# Altium PCB NeoBoard.PcbDoc
Units mil, origin at the board's own origin, x right, y up, seen from the top; angles counter-clockwise.
Board outline 15575.5 x 4696.93 mil, 2 copper layers (Top Layer, Bottom Layer); 181 components, 132 nets, 700 pads, 47 vias.
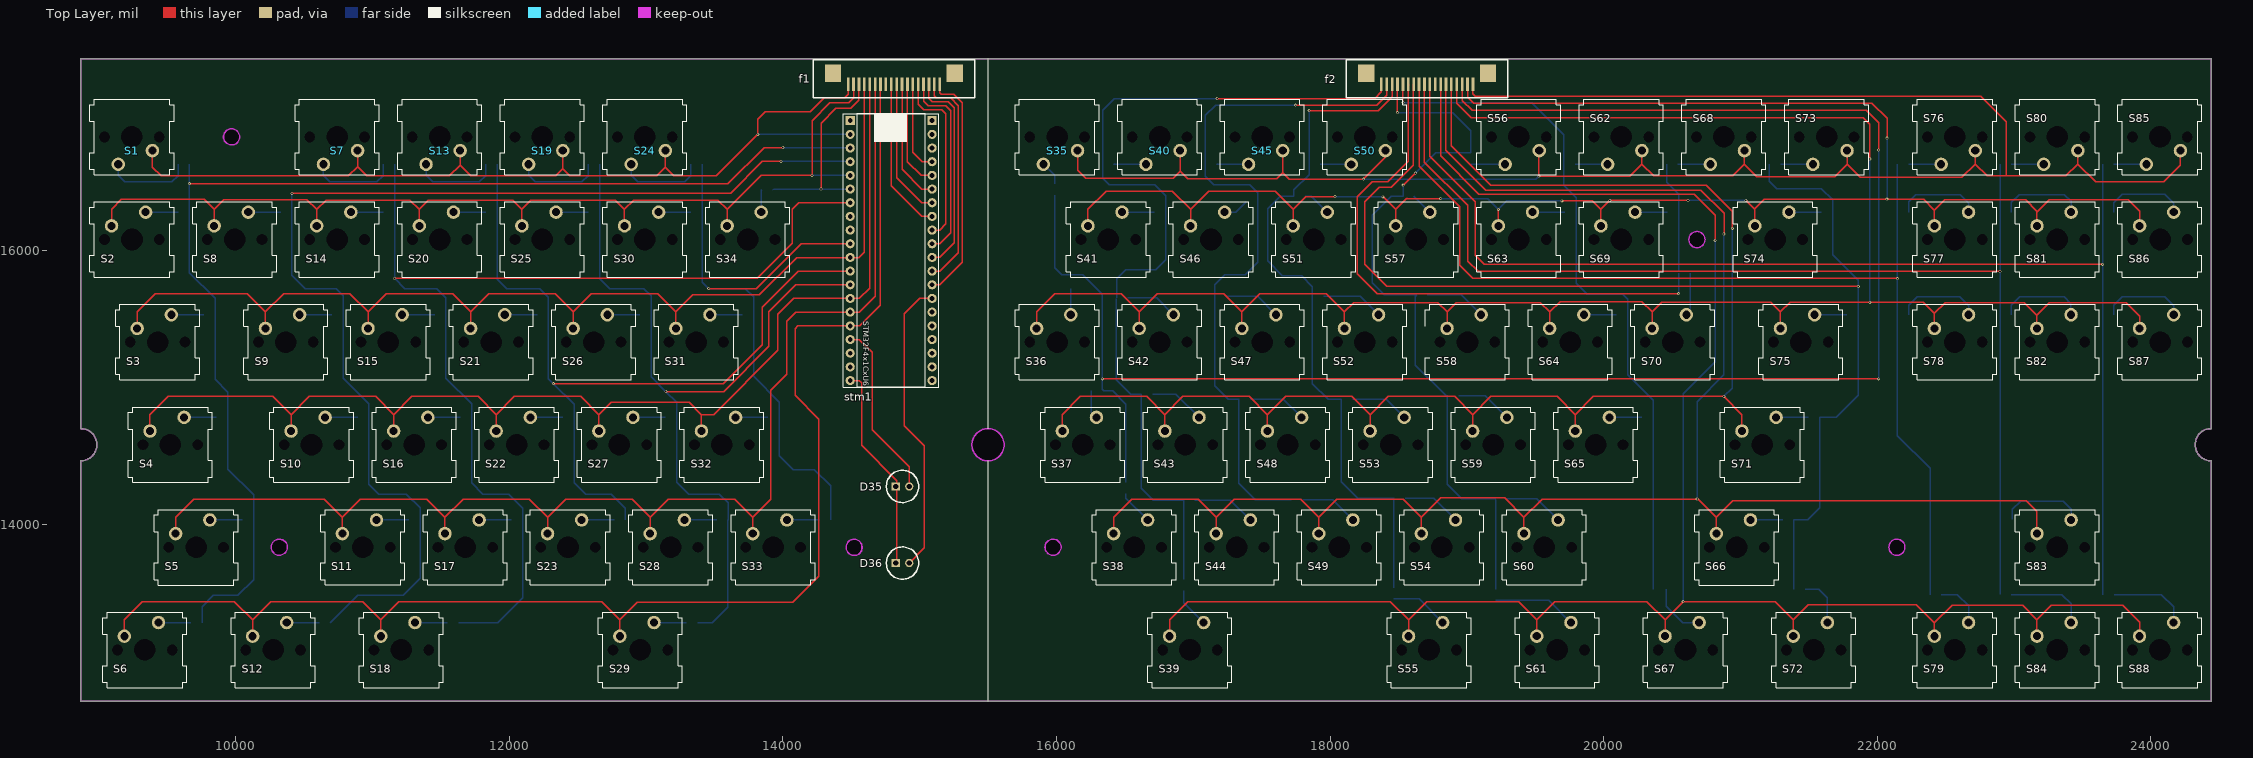
[diagram p0: Top Layer view]
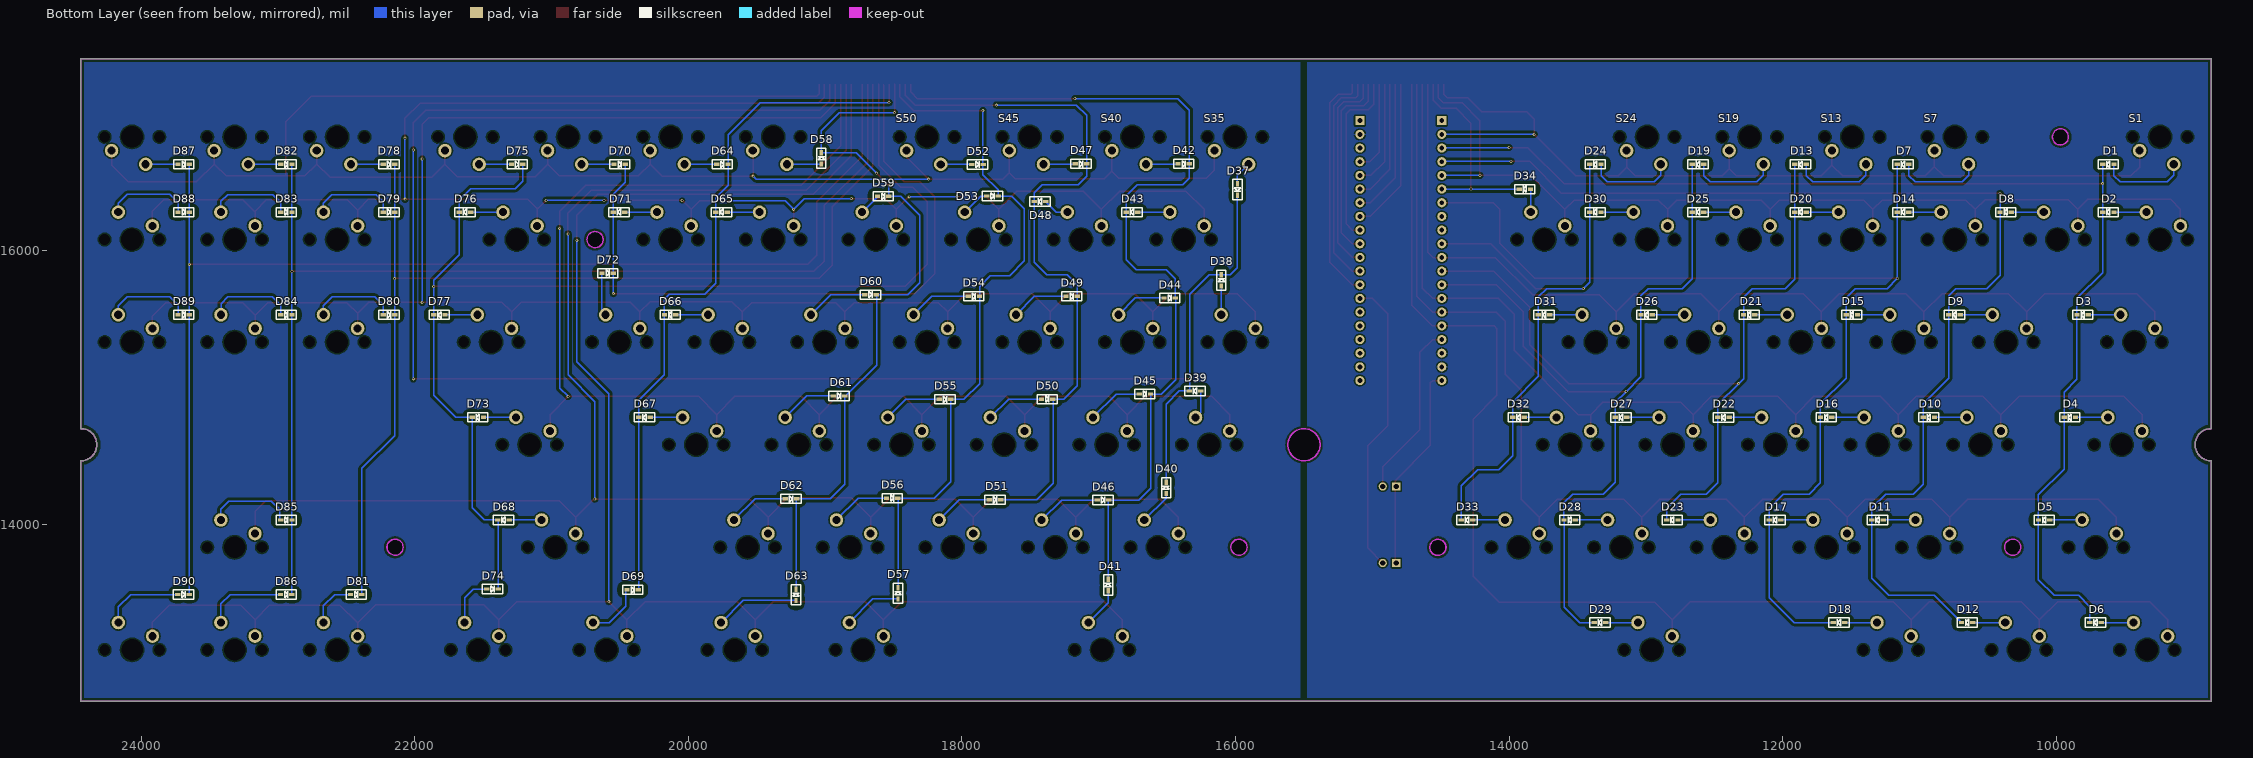
[diagram p1: Bottom Layer view, seen from below]
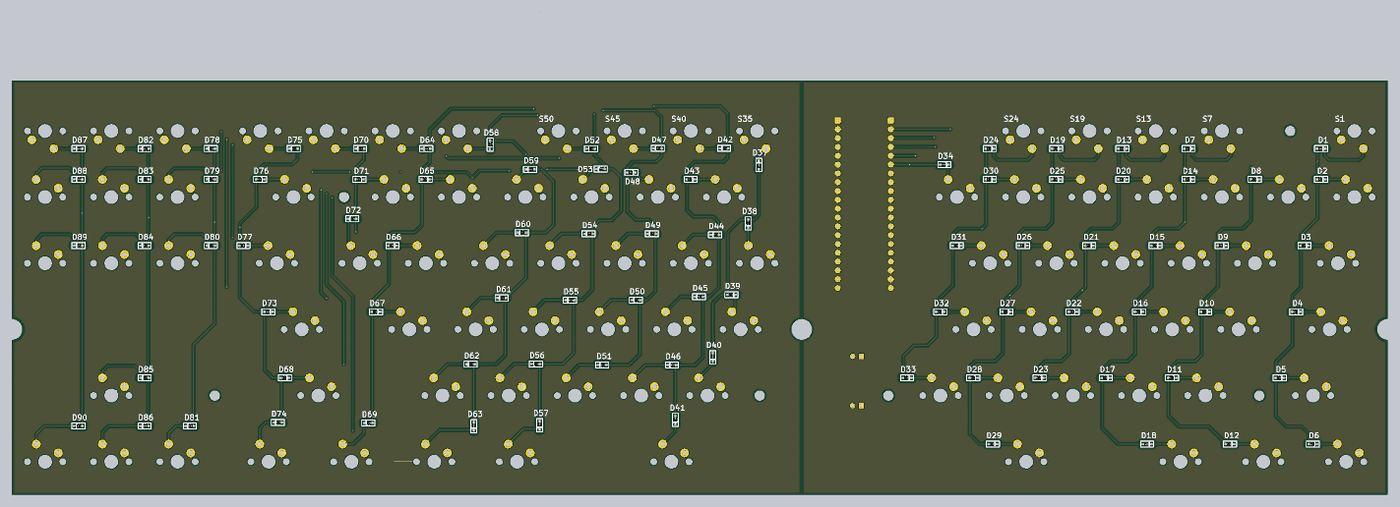
[diagram p2: 3D render of the assembled board from below, using the file's embedded part models]

## Layer stack, top to bottom
Top Solder: solder mask 0.4, Solder Resist, Dk 3.5
Top Layer: signal copper 1.4
Dielectric 1: dielectric 12.6, FR-4, Dk 4.8
Bottom Layer: signal copper 1.4
Bottom Solder: solder mask 0.4, Solder Resist, Dk 3.5

## Board outline
8866.82,12705.3 cw(c8866.82,12705.34) 8866.78,12705.34 8866.78,14462.28 cw(c8866.82,14462.28) 8866.82,14462.32 ccw(c8866.82,14580.39) 8984.89,14580.39 ccw(c8866.82,14580.39) 8866.82,14698.47 cw(c8866.82,14698.5) 8866.78,14698.5 cw(c8866.82,14698.5) 8866.78,14698.5 8866.78,17402.2 cw(c8866.82,17402.2) 8866.82,17402.23 24442.25,17402.23 cw(c24442.25,17402.2) 24442.28,17402.2 24442.28,14698.48 cw(c24442.25,14698.48) 24442.25,14698.44 ccw(c24442.25,14580.36) 24442.25,14462.29 cw(c24442.25,14462.25) 24442.28,14462.25 24442.28,12705.34 cw(c24442.25,12705.34) 24442.25,12705.3
cut-out: 15381.89,14580 ccw(c15500,14580) 15500,14461.89 ccw(c15500,14580) 15618.11,14580 ccw(c15500,14580) 15500,14698.11 ccw(c15500,14580)
cut-out: 15916.94,13830 ccw(c15976,13830) 15976,13770.94 ccw(c15976,13830) 16035.06,13830 ccw(c15976,13830) 15976,13889.06 ccw(c15976,13830)
cut-out: 22085.94,13830 ccw(c22145,13830) 22145,13770.94 ccw(c22145,13830) 22204.06,13830 ccw(c22145,13830) 22145,13889.06 ccw(c22145,13830)
cut-out: 20622.94,16080 ccw(c20682,16080) 20682,16020.94 ccw(c20682,16080) 20741.06,16080 ccw(c20682,16080) 20682,16139.06 ccw(c20682,16080)
cut-out: 9969,16770.94 cw(c9969,16830) 9909.94,16830 cw(c9969,16830) 9969,16889.06 cw(c9969,16830) 10028.06,16830 cw(c9969,16830)
cut-out: 10319,13770.94 cw(c10319,13830) 10259.94,13830 cw(c10319,13830) 10319,13889.06 cw(c10319,13830) 10378.06,13830 cw(c10319,13830)
cut-out: 14459.94,13830 ccw(c14519,13830) 14519,13770.94 ccw(c14519,13830) 14578.06,13830 ccw(c14519,13830) 14519,13889.06 ccw(c14519,13830)

## Design rules (kind name [scope] priority, off if disabled: settings)
Clearance [All] p1: gap=15 ignorepadtopadclearanceinfootprint=FALSE except(10: Arc-Via Arc-Poly Track-Via SMDPad-Via THPad-Via THPad-Poly Via-Via Via-Poly Fill-Poly Poly-Poly Poly-Hole; 20: Track-Poly Poly-Region Poly-Text; 50: SMDPad-Poly)
PolygonConnect [All] p1: connectstyle=Relief reliefconductorwidth=10 reliefentries=4 polygonreliefangle="90 Angle" airgapwidth=10
RoutingVias [All] p1: holewidth=28 width=50 viastyle="Through Hole" minholewidth=28 minwidth=50 maxholewidth=28 maxwidth=50
SolderMaskExpansion [All] p1: expansion=4
UnRoutedNet [All] p1: checkbadconnections=TRUE
UnpouredPolygon [All] p1: allowunpoured=TRUE
Width [All] p1: maxlimit=10 minlimit=10 preferedwidth=10
28 further rules are at their usual default settings.

## Classes and differential pairs
component class Matrix: 86 D01 D1 D02 D2 D03 D3 D04 D4 D5 D05 D06 D6 D7 D07 D8 D08 D09 D9 D10 D11 D12 D13 D14 D15 D16 D17 D18 D19 D20 D21 D22 D23 D24 D25 D26 D27 D28 D29 D30 D31 D32 D33 D34 D35 D36 D91 D92 D93 D94 D95 D96 D97 D98 D99 D100 D101 f1 S1 S2 S3 S4 S5 S6 S7 S8 S9 S10 S11 S12 S13 S14 S15 S16 S17 S18 S19 S20 S21 S22 S23 S25 S26 S27 S28 S29 S30 S31 S32 S33 S34 stm1
component class Sheet1: D37 D38 D39 D40 D41 D42 D43 D44 D45 D46 D47 D48 D49 D50 D51 D52 D53 D54 D55 D56 D57 D58 D59 D60 D61 D62 D63 D64 D65 D66 D67 D68 D69 D70 D71 D72 D73 D74 D75 D76 D77 D78 D79 D80 D81 D82 D83 D84 D85 D86 D87 D88 D89 D90 f2 S35 S36 S37 S38 S39 S40 S41 S42 S43 S44 S45 S46 S47 S48 S49 S50 S51 S52 S53 S54 S55 S56 S57 S58 S59 S60 S61 S62 S63 S64 S65 S66 S67 S68 S69 S70 S71 S72 S73 S74 S75 S76 S77 S78 S79 S80 S81 S82 S83 S84 S85 S86 S87 S88

## Components (designator, comment, footprint, x,y, rotation, side; value= is the part's Value field where it differs from the comment)
D1 "1N4148" SOD323 9619.79,16630.32 r180 bottom
D2 "1N4148" SOD323 9619.79,16280.35 r180 bottom
D3 "1N4148" SOD323 9807.29,15530.35 r180 bottom
D4 "1N4148" SOD323 9901,14780.39 r180 bottom
D5 "1N4148" SOD323 10088.54,14030.33 r180 bottom
D6 "1N4148" SOD323 9713.54,13280.37 r180 bottom
D7 "1N4148" SOD323 11119.78,16630.32 r180 bottom
D8 "1N4148" SOD323 10369.78,16280.33 r180 bottom
D9 "1N4148" SOD323 10745,15530.36 r180 bottom
D10 "1N4148" SOD323 10932.16,14780.36 r180 bottom
D11 "1N4148" SOD323 11307.16,14030.36 r180 bottom
D12 "1N4148" SOD323 10651.04,13280.36 r180 bottom
D13 "1N4148" SOD323 11869.52,16630.32 r180 bottom
D14 "1N4148" SOD323 11119.78,16280.33 r180 bottom
D15 "1N4148" SOD323 11494.79,15530.38 r180 bottom
D16 "1N4148" SOD323 11682.28,14780.41 r180 bottom
D17 "1N4148" SOD323 12057.16,14030.36 r180 bottom
D18 "1N4148" SOD323 11588.54,13280.36 r180 bottom
D19 "1N4148" SOD323 12619.78,16630.36 r180 bottom
D20 "1N4148" SOD323 11869.78,16280.35 r180 bottom
D21 "1N4148" SOD323 12244.79,15530.35 r180 bottom
D22 "1N4148" SOD323 12432.16,14780.33 r180 bottom
D23 "1N4148" SOD323 12807.16,14030.36 r180 bottom
D24 "1N4148" SOD323 13369.78,16630.36 r180 bottom
D25 "1N4148" SOD323 12619.78,16280.33 r180 bottom
D26 "1N4148" SOD323 12994.79,15530.35 r180 bottom
D27 "1N4148" SOD323 13182.16,14780.33 r180 bottom
D28 "1N4148" SOD323 13557.3,14030.41 r180 bottom
D29 "1N4148" SOD323 13336,13280.39 r180 bottom
D30 "1N4148" SOD323 13369.78,16280.36 r180 bottom
D31 "1N4148" SOD323 13744.8,15530.38 r180 bottom
D32 "1N4148" SOD323 13932.3,14780.35 r180 bottom
D33 "1N4148" SOD323 14307.3,14030.38 r180 bottom
D34 "1N4148" SOD323 13885,16448 r180 bottom
D35 "LED0" LED 14874.59,14275.24 r0 top
D36 "LED1" LED 14874.59,13715.2 r0 top
D37 "1N4148" SOD323 15986,16446 r90 bottom
D38 "1N4148" SOD323 16104,15782 r270 bottom
D39 "1N4148" SOD323 16296,14973 r180 bottom
D40 "1N4148" SOD323 16507,14265 r270 bottom
D41 "1N4148" SOD323 16931,13554 r270 bottom
D42 "1N4148" SOD323 16379,16634 r0 bottom
D43 "1N4148" SOD323 16757.51,16280.33 r180 bottom
D44 "1N4148" SOD323 16481,15653 r0 bottom
D45 "1N4148" SOD323 16663,14951 r0 bottom
D46 "1N4148" SOD323 16969,14176 r0 bottom
D47 "1N4148" SOD323 17129.54,16634 r0 bottom
D48 "1N4148" SOD323 17429,16358 r180 bottom
D49 "1N4148" SOD323 17198,15665 r0 bottom
D50 "1N4148" SOD323 17377,14913 r0 bottom
D51 "1N4148" SOD323 17759,14178 r0 bottom
D52 "1N4148" SOD323 17886,16629 r0 bottom
D53 "1N4148" SOD323 17776,16398 r0 bottom
D54 "1N4148" SOD323 17913,15665 r0 bottom
D55 "1N4148" SOD323 18124,14912 r0 bottom
D56 "1N4148" SOD323 18510,14189 r0 bottom
D57 "1N4148" SOD323 18467,13494 r270 bottom
D58 "1N4148" SOD323 19028,16674 r270 bottom
D59 "1N4148" SOD323 18576,16396 r0 bottom
D60 "1N4148" SOD323 18668,15677 r0 bottom
D61 "1N4148" SOD323 18898,14937 r0 bottom
D62 "1N4148" SOD323 19249,14185 r0 bottom
D63 "1N4148" SOD323 19213,13483 r270 bottom
D64 "1N4148" SOD323 19751.71,16630.36 r0 bottom
D65 "1N4148" SOD323 19758,16280.36 r180 bottom
D66 "1N4148" SOD323 20133,15530.36 r180 bottom
D67 "1N4148" SOD323 20320.21,14780.35 r180 bottom
D68 "1N4148" SOD323 21351.43,14030.35 r180 bottom
D69 "1N4148" SOD323 20407,13520 r0 bottom
D70 "1N4148" SOD323 20501.71,16630.33 r0 bottom
D71 "1N4148" SOD323 20507.71,16280.33 r180 bottom
D72 "1N4148" SOD323 20590,15834 r0 bottom
D73 "1N4148" SOD323 21538.93,14780.35 r180 bottom
D74 "1N4148" SOD323 21432,13525 r0 bottom
D75 "1N4148" SOD323 21251.71,16630.36 r0 bottom
D76 "1N4148" SOD323 21632.71,16280.33 r180 bottom
D77 "1N4148" SOD323 21820.21,15530.33 r180 bottom
D78 "1N4148" SOD323 22189.21,16630.36 r0 bottom
D79 "1N4148" SOD323 22189.21,16280.33 r0 bottom
D80 "1N4148" SOD323 22189.21,15530.35 r0 bottom
D81 "1N4148" SOD323 22428,13485 r0 bottom
D82 "1N4148" SOD323 22939.21,16630.33 r0 bottom
D83 "1N4148" SOD323 22939.21,16280.33 r0 bottom
D84 "1N4148" SOD323 22939.21,15530.35 r0 bottom
D85 "1N4148" SOD323 22939.15,14030.38 r0 bottom
D86 "1N4148" SOD323 22940,13485 r0 bottom
D87 "1N4148" SOD323 23689.15,16630.36 r0 bottom
D88 "1N4148" SOD323 23689.15,16280.33 r0 bottom
D89 "1N4148" SOD323 23689.15,15530.35 r0 bottom
D90 "1N4148" SOD323 23690,13485 r0 bottom
f1 "ffc" FFC 14811.94,17295 r0 top
f2 "ffc" FFC 18709.8,17295 r0 top
S1 "MX1A" KEY 9241.37,16830.32 r180 top
S2 "MX1A" KEY 9241.79,16080.35 r0 top
S3 "MX1A" KEY 9429.29,15330.35 r0 top
S4 "MX1A" KEY 9523,14580.39 r0 top
S5 "MX1A" KEY 9710.54,13830.33 r0 top
S6 "MX1A" KEY 9335.54,13080.37 r0 top
S7 "MX1A" KEY 10741.37,16830.32 r180 top
S8 "MX1A" KEY 9991.78,16080.33 r0 top
S9 "MX1A" KEY 10367,15330.36 r0 top
S10 "MX1A" KEY 10554.16,14580.36 r0 top
S11 "MX1A" KEY 10929.16,13830.36 r0 top
S12 "MX1A" KEY 10273.04,13080.36 r0 top
S13 "MX1A" KEY 11491.37,16830.32 r180 top
S14 "MX1A" KEY 10741.78,16080.33 r0 top
S15 "MX1A" KEY 11116.79,15330.38 r0 top
S16 "MX1A" KEY 11304.28,14580.41 r0 top
S17 "MX1A" KEY 11679.16,13830.36 r0 top
S18 "MX1A" KEY 11210.54,13080.36 r0 top
S19 "MX1A" KEY 12241.37,16830.36 r180 top
S20 "MX1A" KEY 11491.78,16080.35 r0 top
S21 "MX1A" KEY 11866.79,15330.35 r0 top
S22 "MX1A" KEY 12054.16,14580.33 r0 top
S23 "MX1A" KEY 12429.16,13830.36 r0 top
S24 "MX1A" KEY 12991.37,16830.36 r180 top
S25 "MX1A" KEY 12241.78,16080.33 r0 top
S26 "MX1A" KEY 12616.79,15330.35 r0 top
S27 "MX1A" KEY 12804.16,14580.33 r0 top
S28 "MX1A" KEY 13179.3,13830.41 r0 top
S29 "MX1A" KEY 12958,13080.39 r0 top
S30 "MX1A" KEY 12991.78,16080.36 r0 top
S31 "MX1A" KEY 13366.8,15330.38 r0 top
S32 "MX1A" KEY 13554.3,14580.35 r0 top
S33 "MX1A" KEY 13929.3,13830.38 r0 top
S34 "MX1A" KEY 13741.78,16080.38 r0 top
S35 "MX1A" KEY 16004.37,16830.36 r180 top
S36 "MX1A" KEY 16004.71,15330.38 r0 top
S37 "MX1A" KEY 16192.21,14580.35 r0 top
S38 "MX1A" KEY 16567.21,13830.33 r0 top
S39 "MX1A" KEY 16976.15,13080.38 r0 top
S40 "MX1A" KEY 16754.37,16830.35 r180 top
S41 "MX1A" KEY 16379.51,16080.33 r0 top
S42 "MX1A" KEY 16754.71,15330.35 r0 top
S43 "MX1A" KEY 16942.21,14580.35 r0 top
S44 "MX1A" KEY 17317.21,13830.35 r0 top
S45 "MX1A" KEY 17504.37,16830.35 r180 top
S46 "MX1A" KEY 17129.71,16080.33 r0 top
S47 "MX1A" KEY 17504.71,15330.33 r0 top
S48 "MX1A" KEY 17692.21,14580.33 r0 top
S49 "MX1A" KEY 18067.21,13830.33 r0 top
S50 "MX1A" KEY 18255,16830 r180 top
S51 "MX1A" KEY 17879.71,16080.33 r0 top
S52 "MX1A" KEY 18254.71,15330.33 r0 top
S53 "MX1A" KEY 18442.21,14580.35 r0 top
S54 "MX1A" KEY 18817.21,13830.35 r0 top
S55 "MX1A" KEY 18723.45,13080.36 r0 top
S56 "MX1A" KEY 19379.71,16830.33 r180 top
S57 "MX1A" KEY 18629.71,16080.35 r0 top
S58 "MX1A" KEY 19004.71,15330.35 r0 top
S59 "MX1A" KEY 19192.21,14580.35 r0 top
S60 "MX1A" KEY 19567.21,13830.36 r0 top
S61 "MX1A" KEY 19660.93,13080.4 r0 top
S62 "MX1A" KEY 20129.71,16830.36 r180 top
S63 "MX1A" KEY 19380,16080.36 r0 top
S64 "MX1A" KEY 19755,15330.36 r0 top
S65 "MX1A" KEY 19942.21,14580.35 r0 top
S66 "MX1A" KEY 20973.43,13830.35 r0 top
S67 "MX1A" KEY 20598.45,13080.4 r0 top
S68 "MX1A" KEY 20879.71,16830.33 r180 top
S69 "MX1A" KEY 20129.71,16080.33 r0 top
S70 "MX1A" KEY 20504.71,15330.38 r0 top
S71 "MX1A" KEY 21160.93,14580.35 r0 top
S72 "MX1A" KEY 21535.93,13080.4 r0 top
S73 "MX1A" KEY 21629.71,16830.36 r180 top
S74 "MX1A" KEY 21254.71,16080.33 r0 top
S75 "MX1A" KEY 21442.21,15330.33 r0 top
S76 "MX1A" KEY 22567.21,16830.36 r180 top
S77 "MX1A" KEY 22567.58,16080.33 r0 top
S78 "MX1A" KEY 22567.58,15330.33 r0 top
S79 "MX1A" KEY 22567.58,13080.36 r0 top
S80 "MX1A" KEY 23317.21,16830.33 r180 top
S81 "MX1A" KEY 23317.58,16080.33 r0 top
S82 "MX1A" KEY 23316.94,15330.36 r0 top
S83 "MX1A" KEY 23317.58,13830.38 r0 top
S84 "MX1A" KEY 23317.58,13080.44 r0 top
S85 "MX1A" KEY 24067.15,16830.36 r180 top
S86 "MX1A" KEY 24067.58,16080.33 r0 top
S87 "MX1A" KEY 24067.58,15330.35 r0 top
S88 "MX1A" KEY 24067,13080.36 r0 top
stm1 "U?" STM32F4X1CXU6_CORE 14767.05,15989.3 r270 top

## Footprints (in the part's own frame and the unit in brackets; to place one, negate y for a bottom-side part, rotate by r counter-clockwise, add the part's x,y. Pads: shape width x height; smd on the part's side, far side on the other; paste and mask are expansions set on the pad)
FFC [mm]
  rect 3x3.2 smd: 0(-11.3,0) 0(11.3,0)
  rect 0.5x2.5 smd: 1(8.5,-2) 2(7.5,-2) 3(6.5,-2) 4(5.5,-2) 5(4.5,-2) 6(3.5,-2) 7(2.5,-2) 8(1.5,-2) 9(0.5,-2) 10(-0.5,-2) 11(-1.5,-2) 12(-2.5,-2) 13(-3.5,-2) 14(-4.5,-2) 15(-5.5,-2) 16(-6.5,-2) 17(-7.5,-2) 18(-8.5,-2)
  silkscreen extent -15,-4.5 15,2.52
KEY [mm]
  round 2.5 hole 1.5: 1(-3.8,2.54) 2(2.54,5.08)
  round 1.524 hole 2 unplated: 6(-5.08,0) 7(5.08,0)
  round 1.524 hole 4 unplated: 6(0,0)
LED [mil]
  rect 60x60 hole 39.37: 1(-49.21,0)
  round 60 hole 39.37: 2(49.21,0)
  silkscreen extent -118,-118 118,118
SOD323 [mm]
  rect 1x0.6 smd: 1(1.055,0) 2(-1.055,0)
  silkscreen extent -1.88,-0.86 1.88,0.86, body extent -1.3,-0.65 1.3,0.65, height 1
STM32F4X1CXU6_CORE [mm]
  rect 1.7x1.7 hole 0.9: 1(-24.384,-6.985) 40(-24.384,8.23)
  round 1.7 hole 0.9: 2(-21.844,-6.985) 3(-19.304,-6.985) 4(-16.764,-6.985) 5(-14.224,-6.985) 6(-11.684,-6.985) 7(-9.144,-6.985) 8(-6.604,-6.985) 9(-4.064,-6.985) 10(-1.524,-6.985) 11(1.016,-6.985) 12(3.556,-6.985) 13(6.096,-6.985) 14(8.636,-6.985) 15(11.176,-6.985) 16(13.716,-6.985) 17(16.256,-6.985) 18(18.796,-6.985) 19(21.336,-6.985) 20(23.876,-6.985) 21(23.876,8.23) 22(21.336,8.23) 23(18.796,8.23) 24(16.256,8.23) 25(13.716,8.23) 26(11.176,8.23) 27(8.636,8.23) 28(6.096,8.23) 29(3.556,8.23) 30(1.016,8.23) 31(-1.524,8.23) 32(-4.064,8.23) 33(-6.604,8.23) 34(-9.144,8.23) 35(-11.684,8.23) 36(-14.224,8.23) 37(-16.764,8.23) 38(-19.304,8.23) 39(-21.844,8.23)
  silkscreen extent -25.65,-8.26 25.15,9.5

## Part data
D1 D2 D3 D4 D5 D6 D7 D8 D9 D10 D11 D12 D13 D14 D15 D16 D17 D18 D19 D20 D21 D22 D23 D24 D25 D26 D27 D28 D29 D30 D31 D32 D33 D34 D37 D38 D39 D40 D41 D42 D43 D44 D45 D46 D47 D48 D49 D50 D51 D52 D53 D54 D55 D56 D57 D58 D59 D60 D61 D62 D63 D64 D65 D66 D67 D68 D69 D70 D71 D72 D73 D74 D75 D76 D77 D78 D79 D80 D81 D82 D83 D84 D85 D86 D87 D88 D89 D90: "二极管"
D35: "Typical INFRARED GaAs LED", LatestRevisionDate=08-Jul-2005, LatestRevisionNote="Mech Layer 1 removed.", PackageDescription="LED; 2 Leads", PackageReference=LED-0, Published=8-Jun-2000, Publisher="Altium Limited"
D36: library part LED0, "Typical INFRARED GaAs LED", LatestRevisionDate=08-Jul-2005, LatestRevisionNote="Mech Layer 1 removed.", PackageDescription="LED; 2 Leads", PackageReference=LED-0, Published=8-Jun-2000, Publisher="Altium Limited"
S1 S2 S3 S4 S5 S6 S7 S8 S9 S10 S11 S12 S13 S14 S15 S16 S17 S18 S19 S20 S21 S22 S23 S24 S25 S26 S27 S28 S29 S30 S31 S32 S33 S34 S35 S36 S37 S38 S39 S40 S41 S42 S43 S44 S45 S46 S47 S48 S49 S50 S51 S52 S53 S54 S55 S56 S57 S58 S59 S60 S61 S62 S63 S64 S65 S66 S67 S68 S69 S70 S71 S72 S73 S74 S75 S76 S77 S78 S79 S80 S81 S82 S83 S84 S85 S86 S87 S88: "按键"
stm1: library part stm32f4x1cxu6_core

## Via types
v1: diameter 22, hole 12, Top Layer to Bottom Layer, 47 vias

## Nets (pads, with @x,y where several pads share a name; then routed paths per layer and width w, separated by ;. In a path a pad name is that pad's centre, name@x,y a point inside that pad or via, vN(x,y) a via of type N, cw(c..) or ccw(c..) an arc to the next point about the centre after c; other vN are vias at no path point)
GND: stm1.18 stm1.19 stm1.39
NetD1_1: D1.1 S1.2 | length 639.9
  Bottom Layer w10: S1.2 9141.37,16548.63 9189,16501 9531,16501 9578.26,16548.26 D1.1
NetD1_2: D1.2 D2.2 D3.2 D4.2 D5.2 D6.2 stm1.3 | length 8745.3
  Top Layer w10: v1(9661.33,16489) 13598,16489 13862,16753 v1(14000,16753)
  Bottom Layer w10: D1.2 v1(9661.33,16489) D2.2 9661.33,15837.67 9848.83,15650.17 D3.2 9848.83,15057.17 9942.54,14963.46 D4.2 9942.54,14401.62 10130.08,14214.08 D5.2 10130.08,13594.08 10015,13479 9837,13479 9755.08,13397.08 D6.2 ; v1(14000,16753) 14488.35,16753 stm1.3
NetD2_1: D2.1 S2.2 | length 236.5
  Bottom Layer w10: S2.2 D2.1
NetD3_1: D3.1 S3.2 | length 236.5
  Bottom Layer w10: S3.2 D3.1
NetD4_1: D4.1 S4.2 | length 236.5
  Bottom Layer w10: S4.2 D4.1
NetD5_1: D5.1 S5.2 | length 236.5
  Bottom Layer w10: S5.2 D5.1
NetD6_1: D6.1 S6.2 | length 236.5
  Bottom Layer w10: S6.2 D6.1
NetD7_1: D7.1 S7.2 | length 639.9
  Bottom Layer w10: S7.2 10641.36,16548.63 10688.99,16501 11030.99,16501 11078.25,16548.26 D7.1
NetD7_2: D7.2 D14.2 D15.2 D16.2 D17.2 D18.2 stm1.7 | length 8053.7
  Top Layer w10: v1(11161.32,15795.68) 13812.68,15795.68 14069,16052 14069,16301 14117.3,16349.3 stm1.7
  Bottom Layer w10: D7.2 D14.2 v1(11161.32,15795.68) 11235,15722 11469,15722 11536.32,15654.68 D15.2 11536.32,15067.68 11723.82,14880.18 D16.2 11723.82,14302.18 11807,14219 11996,14219 12098.69,14116.31 D17.2 12098.69,13462.69 11916.36,13280.36 D18.2
NetD8_1: D8.1 S8.2 | length 236.5
  Bottom Layer w10: S8.2 D8.1
NetD8_2: D8.2 D9.2 D10.2 D11.2 D12.2 stm1.4 | length 8422.3
  Top Layer w10: v1(10411.32,16418.32) 13617.32,16418.32 13851,16652 v1(13986,16652)
  Bottom Layer w10: v1(10411.32,16418.32) D8.2 10411.32,15817.68 10507,15722 10734,15722 10786.54,15669.46 D9.2 10786.54,15066.46 10973.69,14879.31 D10.2 10973.69,14291.31 11046,14219 11248,14219 11348.69,14118.31 D11.2 11348.69,13604.69 11223,13479 10891.21,13479 D12.2 ; v1(13986,16652) 14489.35,16652 stm1.4
NetD9_1: D9.1 S9.2 | length 236.5
  Bottom Layer w10: S9.2 D9.1
NetD10_1: D10.1 S10.2 | length 236.5
  Bottom Layer w10: S10.2 D10.1
NetD11_1: D11.1 S11.2 | length 236.5
  Bottom Layer w10: S11.2 D11.1
NetD12_1: D12.1 S12.2 | length 236.5
  Bottom Layer w10: S12.2 D12.1
NetD13_1: D13.1 S13.2 | length 639.9
  Bottom Layer w10: S13.2@11391.1,16630.32 11391.1,16548.63 11438.73,16501 11780.73,16501 11827.99,16548.26 D13.1
NetD13_2: D13.2 D20.2 D21.2 D22.2 D23.2 stm1.12 | length 5912
  Top Layer w10: v1(12322,15027) 13564,15027 13848,15311 13848,15585 14112.3,15849.3 stm1.12
  Bottom Layer w10: D13.2 11911.32,16630.06 D20.2 11911.32,15790.68 11980,15722 12222,15722 12286.32,15657.68 D21.2 12286.32,15062.68 v1(12322,15027) 12473.69,14875.31 D22.2 12473.69,14303.31 12558,14219 12747,14219 12848.69,14117.31 D23.2
NetD14_1: D14.1 S14.2 | length 236.5
  Bottom Layer w10: S14.2 D14.1
NetD15_1: D15.1 S15.2 | length 236.5
  Bottom Layer w10: S15.2 D15.1
NetD16_1: D16.1 S16.2 | length 236.5
  Bottom Layer w10: S16.2 D16.1
NetD17_1: D17.1 S17.2 | length 236.5
  Bottom Layer w10: S17.2 D17.1
NetD18_1: D18.1 S18.2 | length 236.5
  Bottom Layer w10: S18.2 D18.1
NetD19_1: D19.1 S19.2 | length 639.9
  Bottom Layer w10: S19.2 12141.36,16548.67 12188.99,16501.04 12530.99,16501.04 12578.25,16548.3 D19.1
NetD19_2: D19.2 D25.2 D26.2 D27.2 D28.2 D29.2 stm1.13 | length 5990.3
  Top Layer w10: v1(13144,14969) 13566,14969 13898,15301 13898,15554 14093.3,15749.3 stm1.13
  Bottom Layer w10: D19.2 D25.2 12661.32,15794.68 12734,15722 12983,15722 13036.32,15668.68 D26.2 13036.32,15076.68 v1(13144,14969) 13223.69,14889.31 D27.2 13223.69,14306.31 13311,14219 13536,14219 13598.84,14156.16 D28.2 13596,14027.57 13596,13391 13485.39,13280.39 D29.2
NetD20_1: D20.1 S20.2 | length 236.5
  Bottom Layer w10: S20.2 D20.1
NetD21_1: D21.1 S21.2 | length 236.5
  Bottom Layer w10: S21.2 D21.1
NetD22_1: D22.1 S22.2 | length 236.5
  Bottom Layer w10: S22.2 D22.1
NetD23_1: D23.1 S23.2 | length 236.5
  Bottom Layer w10: S23.2 D23.1
NetD24_1: D24.1 S24.2 | length 639.9
  Bottom Layer w10: S24.2 12891.36,16548.67 12938.99,16501.04 13280.99,16501.04 13328.25,16548.3 D24.1
NetD24_2: D24.2 D30.2 D31.2 D32.2 D33.2 stm1.10 | length 4409.3
  Top Layer w10: v1(13457,15722) 13807,15722 14134.3,16049.3 stm1.10 stm1.10@14494,16049.3
  Bottom Layer w10: D24.2 D30.2 13411.32,15767.68 v1(13457,15722) 13726,15722 13786.33,15661.67 D31.2 13786.33,15079.67 13973.83,14892.17 D32.2 13973.83,14499.17 14075,14398 14230,14398 14348.84,14279.16 D33.2
NetD25_1: D25.1 S25.2 | length 236.5
  Bottom Layer w10: S25.2 D25.1
NetD26_1: D26.1 S26.2 | length 236.5
  Bottom Layer w10: S26.2 D26.1
NetD27_1: D27.1 S27.2 | length 236.5
  Bottom Layer w10: S27.2 D27.1
NetD28_1: D28.1 S28.2 | length 236.5
  Bottom Layer w10: S28.2 D28.1
NetD29_1: D29.1 S29.2 | length 236.5
  Bottom Layer w10: S29.2 D29.1
NetD30_1: D30.1 S30.2 | length 236.5
  Bottom Layer w10: S30.2 D30.1
NetD31_1: D31.1 S31.2 | length 236.5
  Bottom Layer w10: S31.2 D31.1
NetD32_1: D32.1 S32.2 | length 236.5
  Bottom Layer w10: S32.2 D32.1
NetD33_1: D33.1 S33.2 | length 236.5
  Bottom Layer w10: S33.2 D33.1
NetD34_1: D34.1 S34.2 | length 163.8
  Bottom Layer w10: S34.2 13841.78,16440.25 D34.1@13844.54,16443
NetD34_2: D34.2 f1.16 stm1.6 | length 1514.1
  Top Layer w10: v1(14279,16449.3) 14279,16931 14387,17039 14495,17039 14556.03,17100.03 f1.16
  Bottom Layer w10: D34.2@13925.54,16443 13931.83,16449.3 v1(14279,16449.3) stm1.6
NetD35_1: D35.1 D36.1 stm1.20 | length 1518.1
  Top Layer w10: stm1.20 14559.7,15049.3 14575,15034 14575,14575 14833,14317 14833,13722.83 D36.1
NetD35_2: D35.2 stm1.17 | length 1291.9
  Top Layer w10: stm1.17 14558.7,15349.3 14653,15255 14653,14689 14923.8,14418.2 D35.2
NetD36_2: D36.2 stm1.27 | length 2178.1
  Top Layer w10: D36.2 15034,13825.4 15034,14572 14888,14718 14888,15538 14999.3,15649.3 stm1.27
NetD37_1: D37.1 S35.2 | length 176.6
  Bottom Layer w10: S35.2 15986,16548.73 D37.1
NetD37_2: D37.2 D38.2 D39.2 D40.2 f2.3 | length 13223.1
  Top Layer w10: v1(16335,15062) v1(22011,15062) ; f2.3 18965.71,17096.29 19038.33,17023.67 21921.33,17023.67 22011,16934 v1(22011,16735)
  Bottom Layer w10: D37.2 15986,15875 16037.46,15823.54 D38.2 16193.46,15823.54 16335,15682 v1(16335,15062) 16335,14984 16346,14973 16410,14973 16507,14876 D40.2 ; v1(22011,15062) v1(22011,16735)
NetD38_1: D38.1 S36.2 | length 190.7
  Bottom Layer w10: S36.2 16104.71,15720.71 D38.1@16105,15721
NetD39_1: D39.1 S37.2 | length 208.3
  Bottom Layer w10: D39.1 16254.46,14818.09 S37.2
NetD40_1: D40.1 S38.2 | length 259.5
  Bottom Layer w10: D40.1 16507,14190.54 S38.2
NetD41_1: D41.1 S39.2 | length 292.2
  Bottom Layer w10: D41.1 16931,13425.52 S39.2
NetD41_2: D41.2 D42.2 D43.2 D44.2 D45.2 D46.2 f2.18 | length 6617.9
  Top Layer w10: v1(17174.24,17111) 18326,17111 18375.16,17160.16 f2.18
  Bottom Layer w10: D44.2@16437.46,15647.19 16437.46,15056.54 16543,14951 D45.2 16621.46,14260.54 16706,14176 D46.2 16931,14172.46 D41.2 ; D44.2 16439.46,15794.46 16505,15860 16726,15860 16799.05,15933.05 D43.2 16799.05,16398.95 16718,16480 16387,16480 16337.46,16529.54 D42.2 16337.46,17026.46 16422,17111 v1(17174.24,17111)
NetD42_1: D42.1 S40.2 | length 235.3
  Bottom Layer w10: D42.1 16424.19,16630.35 S40.2
NetD43_1: D43.1 S41.2 | length 236.5
  Bottom Layer w10: S41.2 D43.1
NetD44_1: D44.1 S42.2 | length 383
  Bottom Layer w10: D44.1 16732.06,15653 S42.2
NetD45_1: D45.1 S43.2 | length 408.4
  Bottom Layer w10: D45.1 16871.56,14951 S43.2
NetD46_1: D46.1 S44.2 | length 467
  Bottom Layer w10: D46.1 17271.55,14176 S44.2
NetD47_1: D47.1 S45.2 | length 234.8
  Bottom Layer w10: D47.1 17174.73,16630.35 S45.2
NetD47_2: D47.2 D48.2 D49.2 D50.2 D51.2 f2.17 | length 5241.9
  Top Layer w10: v1(17749,17063) 18342,17063 18414.53,17135.53 f2.17
  Bottom Layer w10: D50.2@17332.67,14911 17332.67,14297.33 17452,14178 D51.2 ; D50.2 17256,14913 17156.46,15012.54 D49.2 17156.46,15748.46 17231,15823 17380,15823 17472,15915 D48.2@17472,16358 ; D48.2 17470.54,16423.46 17414,16480 17151,16480 17088,16543 D47.2 17088,16987 17164,17063 v1(17749,17063)
NetD48_1: D48.1 S46.2 | length 189.9
  Bottom Layer w10: S46.2 17309.8,16280.33 D48.1
NetD49_1: D49.1 S47.2 | length 421
  Bottom Layer w10: D49.1 17470.04,15665 S47.2
NetD50_1: D50.1 S48.2 | length 428.6
  Bottom Layer w10: D50.1 17659.54,14913 S48.2
NetD51_1: D51.1 S49.2 | length 427.8
  Bottom Layer w10: D51.1 18019.54,14178 S49.2
NetD52_1: D52.1 S50.2 | length 227.9
  Bottom Layer w10: D52.1 17928.54,16630 S50.2
NetD52_2: D52.2 D53.2 D54.2 D55.2 D56.2 D57.2 f2.16 | length 5087.7
  Top Layer w10: v1(17847,17022) 18351,17022 18453.9,17124.9 f2.16
  Bottom Layer w10: v1(17847,17022) 17847,16555.54 17734.46,16443 D53.2 17637,16398 17543,16304 17543,15925 17652,15816 17792,15816 17871.46,15736.54 D54.2 17871.46,15026.54 17986,14912 D55.2 18082.46,14310.54 18204,14189 D56.2 18467,14187.54 D57.2
NetD53_1: D53.1 S51.2 | length 245
  Bottom Layer w10: D53.1 17862.04,16398 S51.2 S51.2@18013.8,16280.33
NetD54_1: D54.1 S52.2 | length 456
  Bottom Layer w10: D54.1 18220.04,15665 S52.2
NetD55_1: D55.1 S53.2 | length 431.2
  Bottom Layer w10: D55.1 18410.56,14912 S53.2
NetD56_1: D56.1 S54.2 | length 431.4
  Bottom Layer w10: D56.1 18758.55,14189 S54.2
NetD57_1: D57.1 S55.2 | length 427.7
  Bottom Layer w10: D57.1 18651.35,13452.46 S55.2
NetD58_1: D58.1 S56.2 | length 251.7
  Bottom Layer w10: D58.1@19028,16630.33 S56.2
NetD58_2: D58.2 D59.2 D60.2 D61.2 D62.2 D63.2 f2.15 | length 5320.4
  Top Layer w10: v1(18493,17008) 18493,17215.99 f2.15 ; v1(18534.46,16477.46) 18622,16565 v1(18625,16565)
  Bottom Layer w10: v1(18493,17008) 18896,17008 19028,16876 D58.2 18772.54,16715.54 18625,16568 v1(18625,16565) ; v1(18534.46,16477.46) D59.2 18448,16396 18310,16258 18310,15764 18397,15677 D60.2 18633.28,15670.19 18623,15670.19 18623,15162.59 18848.59,14937 D61.2 18856.46,14290.54 18962,14185 D62.2 19213,14179.46 D63.2
NetD59_1: D59.1 S57.2 | length 165
  Bottom Layer w10: D59.1@18613.06,16397 S57.2
NetD60_1: D60.1 S58.2 | length 455.9
  Bottom Layer w10: D60.1 18958.06,15677 S58.2
NetD61_1: D61.1 S59.2 | length 418.4
  Bottom Layer w10: D61.1@18939.54,14939 19133.56,14939 S59.2
NetD62_1: D62.1 S60.2 | length 440.7
  Bottom Layer w10: D62.1 19512.57,14185 S60.2
NetD63_1: D63.1 S61.2 | length 614.6
  Bottom Layer w10: D63.1 19599.87,13441.46 S61.2
NetD64_1: D64.1 S62.2 | length 236.5
  Bottom Layer w10: D64.1 S62.2
NetD64_2: D64.2 D65.2 D66.2 D67.2 D69.2 f2.14 | length 5151.5
  Top Layer w10: v1@18532.64,17081 f2.14
  Bottom Layer w10: v1(18533,17081) 19475,17081 19710.17,16845.83 D64.2 19710.17,16475.83 19799.54,16386.46 D65.2 19799.54,15762.46 19882,15680 20139.37,15680 20174.54,15645.46 D66.2 20175,15529.9 20175,15092 20361.74,14905.26 D67.2 D69.2@20361.74,13525
NetD65_1: D65.1 S63.2 | length 236.5
  Bottom Layer w10: S63.2 D65.1
NetD66_1: D66.1 S64.2 | length 236.5
  Bottom Layer w10: S64.2 D66.1
NetD67_1: D67.1 S65.2 | length 236.5
  Bottom Layer w10: S65.2 D67.1
NetD68_1: D68.1 S66.2 | length 236.5
  Bottom Layer w10: S66.2 D68.1
NetD68_2: D68.2 D73.2 D74.2 D75.2 D76.2 D77.2 f2.12 | length 9079
  Top Layer w10: f2.12 18609,17213.88 18609,16624 18447,16462 18359,16462 18255,16358 18255,15901 18416,15740 21858.74,15740 v1(21861.74,15737)
  Bottom Layer w10: D75.2 21210.17,16506.83 21265,16452 21592,16452 21674.24,16369.76 D76.2 21674.24,15968.76 21861.74,15781.26 v1(21861.74,15737) D77.2 21861.74,14941.74 21700.35,14780.35 D73.2 21580.46,14119.46 21491.35,14030.35 D68.2 21390.46,14027.85 D74.2
NetD69_1: D69.1 S67.2 | length 415
  Bottom Layer w10: D69.1@20458,13525 20458,13400 20577.6,13280.4 S67.2
NetD70_1: D70.1 S68.2 | length 236.5
  Bottom Layer w10: D70.1 S68.2
NetD70_2: D70.2 D71.2 D72.2 f2.13 | length 4991.5
  Top Layer w10: f2.13 18576,17212.27 18571,17207.27 18571,16651 18421,16501 18308,16501 18199,16392 18199,15831 18345,15685 v1(20548.46,15685)
  Bottom Layer w10: D70.2 20460.17,16499.83 20549.24,16410.76 D71.2 20549.24,15844.24 D72.2@20549,15844 ; v1(20548.46,15685) D72.2
NetD71_1: D71.1 S69.2 | length 236.5
  Bottom Layer w10: S69.2 D71.1
NetD72_1: D72.1 S70.2 | length 314.7
  Bottom Layer w10: S70.2 20631.54,15557.21 D72.1
NetD73_1: D73.1 S71.2 | length 236.5
  Bottom Layer w10: S71.2 D73.1
NetD74_1: D74.1 S72.2 | length 370.1
  Bottom Layer w10: D74.1 21573,13525 21635.93,13462.07 S72.2
NetD75_1: D75.1 S73.2 | length 236.5
  Bottom Layer w10: D75.1 S73.2
NetD76_1: D76.1 S74.2 | length 267.3
  Bottom Layer w10: S74.2@21376.54,16258.51 S74.2 D76.1
NetD77_1: D77.1 S75.2 | length 236.5
  Bottom Layer w10: S75.2 D77.1
NetD78_1: D78.1 S76.2 | length 236.5
  Bottom Layer w10: D78.1 S76.2
NetD78_2: D78.2 D79.2 D80.2 D81.2 f2.11 | length 7934.8
  Top Layer w10: f2.11 18650.75,16616 18947,16319.75 18947,15892 19042,15797 22145,15797 v1(22148,15794)
  Bottom Layer w10: D78.2 D79.2 22148,16280.01 22147,16279.01 22148,16278.01 v1(22148,15794) 22148,15532.68 22147,15531.68 22148,15530.68 D80.2 22147.67,14645.33 22386.46,14406.54 D81.2
NetD79_1: D79.1 S77.2 | length 623.5
  Bottom Layer w10: D79.1 22230.74,16354.74 22283,16407 22606,16407 22667.58,16345.42 S77.2
NetD80_1: D80.1 S78.2 | length 624.5
  Bottom Layer w10: D80.1@22230.76,15530.33 22230.76,15600.69 22291.07,15661 22602.07,15661 22667.58,15595.49 S78.2
NetD81_1: D81.1 S79.2 | length 354.3
  Bottom Layer w10: D81.1 22585,13485 22667.58,13402.42 S79.2
NetD82_1: D82.1 S80.2 | length 241.4
  Bottom Layer w10: D82.1 S80.2 ; S80.2@23233.14,16630.33 S80.2@23236.64,16633.83
NetD82_2: D82.2 D83.2 D84.2 D85.2 D86.2 f2.10 | length 8491
  Top Layer w10: f2.10 18690.12,16646.88 19007,16330 19007,15923 19083,15847 v1(22897.67,15847)
  Bottom Layer w10: D86.2@22897.67,13486 D84.2 v1(22897.67,15847) D83.2 D82.2
NetD83_1: D83.1 S81.2 | length 631.6
  Bottom Layer w10: D83.1 22980.74,16352.74 23037,16409 23367,16409 23417.58,16358.42 S81.2
NetD84_1: D84.1 S82.2 | length 627.3
  Bottom Layer w10: D84.1@22980.76,15530.36 22980.76,15600.72 23041.07,15661.03 23365.97,15661.03 23416,15611 S82.2@23416,15535
NetD85_1: D85.1 S83.2 | length 628.1
  Bottom Layer w10: D85.1@22988,14037 22988,14107.36 23048.31,14167.67 23359.31,14167.67 23417.58,14109.4 S83.2
NetD86_1: D86.1 S84.2 | length 600.4
  Bottom Layer w10: D86.1 23349,13485 23417.58,13416.42 S84.2
NetD87_1: D87.1 S85.2 | length 236.5
  Bottom Layer w10: D87.1 S85.2
NetD87_2: D87.2 D88.2 D89.2 D90.2 f2.9 | length 9147.5
  Top Layer w10: f2.9 18729.49,16690.51 19063,16357 19063,15965 19129,15899 v1(23648,15899)
  Bottom Layer w10: D87.2 D88.2 D89.2 23647.62,13485.85 D90.2
NetD88_1: D88.1 S86.2 | length 629.9
  Bottom Layer w10: D88.1 23730.69,16350.69 23791,16411 24102,16411 24167.58,16345.42 S86.2 S86.2@24173,16280.33
NetD89_1: D89.1 S87.2 | length 624.5
  Bottom Layer w10: D89.1 23730.69,15600.7 23791,15661.02 24101.98,15661.02 24167.58,15595.42 S87.2
NetD90_1: D90.1 S88.2 | length 588
  Bottom Layer w10: D90.1 24078,13485 24167,13396 S88.2
Netf1_1: f1.1 stm1.28 | length 1715.8
  Top Layer w10: stm1.28 15148.3,15749.3 15313,15914 15313,17079 15250,17142 15157,17142 15146.58,17152.42 f1.1
Netf1_2: f1.2 stm1.29 | length 1612.9
  Top Layer w10: stm1.29 15148.3,15849.3 15282,15983 15282,17059 15226,17115 15122,17115 15107.21,17129.79 f1.2
Netf1_3: f1.3 stm1.30 | length 1513.1
  Top Layer w10: f1.3 15067.84,17112.16 15093,17087 15210,17087 15254,17043 15254,16056 15147.3,15949.3 stm1.30
Netf1_4: f1.4 stm1.31 | length 1414
  Top Layer w10: f1.4 15028.47,17092.53 15062,17059 15191,17059 15227,17023 15227,16129 15147.3,16049.3 stm1.31
Netf1_5: f1.5 stm1.32 | length 1303.7
  Top Layer w10: f1.5 14989.1,17069.9 15029,17030 15162,17030 15192,17000 15192,16194 15147.3,16149.3 stm1.32
Netf1_6: f1.6 stm1.37 | length 668.5
  Top Layer w10: f1.6 14949.73,16717.27 15017.7,16649.3 stm1.37
Netf1_7: f1.7 stm1.36 | length 788.3
  Top Layer w10: f1.7 14910.36,16650.64 15011.7,16549.3 stm1.36
Netf1_8: f1.8 stm1.35 | length 902.8
  Top Layer w10: f1.8 14870.99,16593.01 15014.7,16449.3 stm1.35
Netf1_9: f1.9 stm1.34 | length 1018.6
  Top Layer w10: f1.9 14831.62,16533.38 15015.7,16349.3 stm1.34
Netf1_10: f1.10 stm1.33 | length 1134.9
  Top Layer w10: f1.10 14792.25,16472.75 15015.7,16249.3 stm1.33
Netf1_12: f1.12 S6.1 S12.1 S18.1 S29.1 stm1.16 | length 10212.4
  Top Layer w10: S6.1 9185.93,13300.7 9318.23,13433 9991.12,13433 10123.43,13300.68 ; S12.1 10123.43,13300.68 ; S18.1 11060.93,13300.68 ; S29.1 12808.39,13300.72 ; f1.12 14713.51,17002.51 14713.51,15599.51 14563.3,15449.3 stm1.16 14109.3,15449.3 14089,15429 14089,14942 14263,14768 14263,13620 14071.14,13428.14 12935.82,13428.14 12808.39,13300.72 ; 10123.43,13300.68 10255.74,13433 10928.62,13433 11060.93,13300.68 ; 11060.93,13300.68 11193.28,13433.03 12676.08,13433.03 12808.39,13300.72
Netf1_13: f1.13 S5.1 S11.1 S17.1 S23.1 S28.1 S33.1 stm1.15 | length 9295.4
  Top Layer w10: S5.1 9560.93,14050.65 9693.17,14182.89 10647.13,14182.89 10647.24,14183 10779.55,14050.68 ; S11.1 10779.55,14050.68 ; S17.1 11529.55,14050.68 ; S23.1 12279.55,14050.67 ; S28.1@13029.55,13930.36 13029.55,14050.68 ; S33.1@13779.55,13930.36 13779.55,14050.68 ; f1.13 14674.14,15666.14 14557.3,15549.3 stm1.15 14095.3,15549.3 14028,15482 14028,15096 13912,14980 13912,14183.13 13779.55,14050.68 ; 10779.55,14050.68 10911.79,14182.92 11397.16,14182.92 11397.24,14183 11529.55,14050.68 ; 11529.55,14050.68 11661.79,14182.92 12147.18,14182.92 12147.24,14182.98 12279.55,14050.67 ; 12279.55,14050.67 12411.79,14182.91 12897.15,14182.91 12897.24,14183 13029.55,14050.68 ; 13029.55,14050.68 13161.79,14182.92 13647.16,14182.92 13647.24,14183 13779.55,14050.68
Netf1_14: f1.14 S4.1 S10.1 S16.1 S22.1 S27.1 S32.1 stm1.14 | length 8524.7
  Top Layer w10: S4.1 9373.39,14800.72 9505.68,14933 10272.24,14933 10404.55,14800.69 ; S10.1 10404.55,14800.69 ; S16.1@11154.55,14680.36 11154.55,14800.69 ; S22.1 11904.55,14800.67 ; S27.1@12654.55,14680.36 12654.55,14800.69 ; S32.1@13404.55,14680.36 13404.55,14800.69 ; f1.14 14634.77,15724.77 14559.3,15649.3 stm1.14 14078.3,15649.3 13964,15535 13964,15271 13493.69,14800.69 13404.55,14800.69 ; 10404.55,14800.69 10536.79,14932.93 11022.16,14932.93 11022.24,14933 11154.55,14800.69 ; 11154.55,14800.69 11286.79,14932.93 11772.18,14932.93 11772.24,14932.98 11904.55,14800.67 ; 11904.55,14800.67 12036.79,14932.91 12522.15,14932.91 12522.24,14933 12654.55,14800.69 ; 12654.55,14800.69 12743.87,14890 13315.24,14890 13404.55,14800.69
Netf1_15: f1.15 S3.1 S9.1 S15.1 S21.1 S26.1 S31.1 stm1.11 | length 7994.9
  Top Layer w10: S3.1 9279.69,15550.67 9411.93,15682.91 10084.99,15682.91 10085.08,15683 10217.39,15550.69 ; S9.1 10217.39,15550.69 ; S15.1@10967.39,15430.36 10967.39,15550.69 ; S21.1@11717.39,15430.35 11717.39,15550.67 ; S26.1@12467.39,15430.36 12467.39,15550.69 ; S31.1@13217.39,15430.36 13217.39,15550.69 ; f1.15 14595.4,15988.4 14555,15948 14100,15948 13827,15675 13341.7,15675 13217.39,15550.69 ; 10217.39,15550.69 10349.63,15682.93 10835,15682.93 10835.08,15683 10967.39,15550.69 ; 10967.39,15550.69 11099.63,15682.93 11585.02,15682.93 11585.08,15682.99 11717.39,15550.67 ; 11717.39,15550.67 11849.63,15682.91 12334.99,15682.91 12335.08,15683 12467.39,15550.69 ; 12467.39,15550.69 12599.63,15682.93 13085,15682.93 13085.08,15683 13217.39,15550.69
Netf1_17: f1.17 S2.1 S8.1 S14.1 S20.1 S25.1 S30.1 S34.1 stm1.5 | length 7560.7
  Top Layer w10: S2.1 9092.19,16300.67 9164.51,16373 9769.86,16373 9842.19,16300.67 ; S8.1 9842.19,16300.67 ; S14.1 10592.19,16300.66 ; S20.1 11342.19,16300.67 ; S25.1 12092.19,16300.67 ; S30.1 12842.19,16300.7 ; S34.1 13592.19,16300.19 13841,16549 v1(14213,16549) 14213,16950 14342,17079 14480,17079 14516.66,17115.66 f1.17 ; 13592.19,16300.72 13523.91,16369 12910.49,16369 12842.19,16300.7 ; 9842.19,16300.67 9913.51,16372 10520.84,16372 10592.19,16300.66 ; 10592.19,16300.66 10660.53,16369 11273.86,16369 11342.19,16300.67 ; 11342.19,16300.67 11408.51,16367 12025.86,16367 12092.19,16300.67 ; 12092.19,16300.67 12158.51,16367 12775.89,16367 12842.19,16300.7
  Bottom Layer w10: v1(14213,16549) 14491.75,16549 stm1.5
Netf1_18: f1.18 S1.1 S7.1 S13.1 S19.1 S24.1 stm1.2 | length 6986.5
  Top Layer w10: S1.1 9390.98,16610.02 9455,16546 10822.95,16546 10890.98,16614.02 ; S7.1 10890.98,16614.02 ; S13.1 11640.98,16625.02 ; S19.1 12390.98,16596.02 ; S24.1 13140.98,16608.02 ; f1.18 14477.29,17143.29 14451.83,17117.83 14302.83,17117.83 14199,17014 13870,17014 13817,16961 13817,16850 13513,16546 13203,16546 13140.98,16608.02 ; 10890.98,16614.02 10959,16546 11561.95,16546 11640.98,16625.02 ; 11640.98,16625.02 11720,16546 12340.95,16546 12390.98,16596.02 ; 12390.98,16596.02 12441,16546 13078.95,16546 13140.98,16608.02
  Bottom Layer w10: v1(13817,16849.3) stm1.2
Netf2_1: f2.1 S35.1 S40.1 S45.1 S50.1 S56.1 S62.1 S68.1 S73.1 S76.1 S80.1 S85.1 | length 14596
  Top Layer w10: S35.1 16153.98,16588.02 16213,16529 16854.95,16529 16903.98,16578.02 ; S40.1 16903.98,16578.02 ; 17653,16568 17653.98,16567.02 ; S45.1 17653.98,16567.02 ; S50.1@18403,16737 18403,16680 v1(18244,16521) 17700,16521 17653.98,16567.02 ; f2.1 19044.45,17145.55 19061,17129 22757,17129 22944,16942 22944,16545 ; S56.1 19526,16727.01 v1(19526,16543) 19527,16544 20191.1,16544 20279.31,16632.22 ; S62.1 20279.31,16632.22 ; S68.1 21029.31,16632.19 ; S73.1 21779.31,16632.22 ; S76.1 22716.81,16632.22 ; S80.1 23466.81,16632.19 ; S85.1 24216.76,16624.76 24093,16501 23598,16501 23466.81,16632.19 ; 16903.98,16578.02 16958,16524 17610.95,16524 17653.98,16567.02 ; 20279.31,16632.22 20365.53,16546 20943.13,16546 21029.31,16632.19 ; 21029.31,16632.19 21120.5,16541 21688.1,16541 21779.31,16632.22 ; 21779.31,16632.22 21876.53,16535 22619.6,16535 22716.81,16632.22 ; 22716.81,16632.22 22804.03,16545 22944,16545 ; 22944,16545 23379.63,16545 23466.81,16632.19
  Bottom Layer w10: v1(18244,16521) 19504,16521 v1(19526,16543)
Netf2_2: f2.2 S41.1 S46.1 S51.1 S57.1 S63.1 S69.1 S74.1 S77.1 S81.1 S86.1 | length 13350.4
  Top Layer w10: S41.1 16229.91,16300.66 16362.15,16432.9 16847.71,16432.9 16847.79,16432.97 16980.1,16300.66 ; S46.1 16980.1,16300.66 ; S51.1 17730.1,16300.66 ; v1(18036,16394) 17823.44,16394 17730.1,16300.66 ; v1(18386,16392) 18388.78,16392 18480.1,16300.67 ; S57.1 18480.1,16300.67 ; v1(18809,16380) 18563.43,16380 18561.43,16382 18480.1,16300.67 ; f2.2 19005.08,17121.92 19050.67,17076.33 21961.67,17076.33 22072,16966 v1(22072,16821) ; S63.1 v1(19230.39,16300.69) ; v1(19695,16363) 19917.76,16363 19980.1,16300.66 ; S69.1 19980.1,16300.66 ; v1(20617,16366) v1(20045.44,16366) 19980.1,16300.66 ; v1(21039.76,16366) 21105.1,16300.66 ; S74.1 21105.1,16300.66 ; S77.1 22417.97,16296.03 ; S81.1 23167.98,16280 ; S86.1 23917.97,16286.03 23834,16370 23257.98,16370 23167.98,16280 ; 16980.1,16300.66 17112.34,16432.9 17597.86,16432.9 17730.1,16300.66 ; 21105.1,16300.66 21105.1,16305.1 21175.22,16375.22 v1(22070.78,16375.22) 22338.78,16375.22 22417.97,16296.03 ; 22417.97,16296.03 22491.94,16370 23084,16370 23167.98,16286.02 23167.98,16280
  Bottom Layer w10: v1(18036,16394) 18384,16394 v1(18386,16392) ; v1(18809,16380) 19151.08,16380 v1(19230.39,16300.69) 19292.7,16363 v1(19695,16363) ; v1(20617,16366) v1(21039.76,16366) ; v1(22070.78,16375.22) 22072,16374 v1(22072,16821)
Netf2_4: f2.4 S36.1 S42.1 S47.1 S52.1 S58.1 S64.1 S70.1 S75.1 S78.1 S82.1 S87.1 | length 14621.8
  Top Layer w10: S36.1 15855.1,15550.7 15987.39,15682.99 16472.79,15682.99 16605.1,15550.67 ; S42.1 16605.1,15550.67 ; S47.1 17355.1,15550.66 ; S52.1 18105.1,15550.66 ; S58.1 18855.1,15550.67 ; f2.4 18926.34,17075.66 19031,16971 21898,16971 21946,16923 v1(21946,16669) ; S64.1 19605.39,15550.69 ; S70.1 20355.1,15550.7 ; S75.1 21292.6,15550.66 ; S78.1 22417.97,15540.03 ; S82.1 23167.34,15525.66 ; S87.1 23917.97,15521.03 23822,15617 23258.68,15617 23167.34,15525.66 ; 16605.1,15550.67 16737.4,15682.97 17222.79,15682.97 17355.1,15550.66 ; 17355.1,15550.66 17487.42,15682.97 17972.79,15682.97 18105.1,15550.66 ; 18105.1,15550.66 18173.44,15619 18786.78,15619 18855.1,15550.67 ; 18855.1,15550.67 18923.43,15619 19537.08,15619 19605.39,15550.69 ; 19605.39,15550.69 19681.7,15627 20278.81,15627 20355.1,15550.7 ; 20355.1,15550.7 20425.4,15621 21222.26,15621 21292.6,15550.66 ; 21292.6,15550.66 21362.94,15621 v1(21946,15621) 22337,15621 22417.97,15540.03 ; 22417.97,15540.03 22496.94,15619 23074,15619 23167.34,15525.66
  Bottom Layer w10: v1(21946,15621) v1(21946,16669)
Netf2_5: f2.5 S37.1 S43.1 S48.1 S53.1 S59.1 S65.1 S71.1 | length 10551.7
  Top Layer w10: S37.1 16042.6,14800.67 16174.84,14932.91 16660.21,14932.91 16660.29,14932.99 16792.6,14800.67 ; S43.1 16792.6,14800.67 ; S48.1 17542.6,14800.66 ; S53.1 18292.6,14800.67 ; f2.5 18886.97,16766.03 19175,16478 20750,16478 20941,16287 v1(20941,16162) ; S59.1 19042.6,14800.67 ; S65.1 19792.6,14800.67 ; S71.1 21011.32,14800.67 20879.01,14932.99 v1(20878.93,14932.91) 19924.84,14932.91 19792.6,14800.67 ; 16792.6,14800.67 16924.84,14932.91 17410.23,14932.91 17410.29,14932.97 17542.6,14800.66 ; 17542.6,14800.66 17674.84,14932.9 18160.2,14932.9 18160.29,14932.99 18292.6,14800.67 ; 18292.6,14800.67 18424.84,14932.91 18910.21,14932.91 18910.29,14932.99 19042.6,14800.67 ; 19042.6,14800.67 19174.84,14932.91 19660.21,14932.91 19660.29,14932.99 19792.6,14800.67
  Bottom Layer w10: v1(20878.93,14932.91) 20879.91,14932.91 20941,14994 v1(20941,16162)
Netf2_6: f2.6 S38.1 S44.1 S49.1 S54.1 S60.1 S66.1 S83.1 | length 13149.9
  Top Layer w10: S38.1 16417.6,14050.65 16549.84,14182.89 17035.38,14182.89 ; 17035.29,14182.98 17035.38,14182.89 ; S44.1 17167.6,14050.67 ; 17785.29,14182.97 17785.35,14182.91 ; S49.1 17917.6,14050.65 ; 18535.29,14182.98 18535.38,14182.89 ; S54.1 18667.6,14050.67 ; f2.6 18847.6,16733.4 19139,16442 20709,16442 20880,16271 20880,16122 v1(20879,16121) ; S60.1 19417.6,14050.69 ; v1@20691.51,14182.93 19549.84,14182.93 19417.6,14050.69 ; v1@20691.51,14182.98 20823.82,14050.67 ; S66.1 20823.82,14050.67 ; S83.1 23167.97,14095.03 23091,14172 20945.15,14172 20823.82,14050.67 ; 17035.38,14182.89 17167.6,14050.67 ; 17167.6,14050.67 17299.84,14182.91 17785.35,14182.91 ; 17785.35,14182.91 17917.6,14050.65 ; 17917.6,14050.65 18049.84,14182.89 18535.38,14182.89 ; 18535.38,14182.89 18667.6,14050.67 ; 18667.6,14050.67 18807.93,14191 19277.29,14191 19417.6,14050.69
  Bottom Layer w10: v1(20684,14183) 20684,14895 20879,15090 v1(20879,16121)
Netf2_7: f2.7 S39.1 S55.1 S61.1 S67.1 S72.1 S79.1 S84.1 S88.1 | length 14386.9
  Top Layer w10: S39.1 16826.54,13300.7 16958.78,13432.94 18441.53,13432.94 ; 18441.53,13433 18573.84,13300.69 ; S55.1 18573.84,13300.69 ; f2.7 18808.23,16691.77 19088,16412 20662,16412 20816,16258 20815,16257 v1(20815,16074) ; 19379.01,13432.93 18706.08,13432.93 18573.84,13300.69 ; 19379.01,13433.04 19511.32,13300.73 ; S61.1 19511.32,13300.73 ; 20316.53,13432.97 19643.56,13432.97 19511.32,13300.73 ; 20316.53,13433.04 20448.84,13300.73 ; S67.1 20448.84,13300.73 ; 21254.01,13432.97 v1(20581.08,13432.97) 20448.84,13300.73 ; 21254.01,13433.04 21386.32,13300.73 ; S72.1 21386.32,13300.73 ; S79.1 22417.97,13277.97 ; S84.1@23163.56,13180.44 S84.1 23167.97,13301.97 ; S88.1@23919,13180.36 23919,13284 23796,13407 23273,13407 23167.97,13301.97 ; 21386.32,13300.73 21497.59,13412 22283.94,13412 22417.97,13277.97 ; 22417.97,13277.97 22547,13407 23062.94,13407 23167.97,13301.97
  Bottom Layer w10: v1(20581.08,13432.97) 20581.08,14952.08 20815,15186 v1(20815,16074)
pads on no net: f1.0 f1.11 f2.0 f2.8 S1.6 S1.7 S2.6 S2.7 S3.6 S3.7 S4.6 S4.7 S5.6 S5.7 S6.6 S6.7 S7.6 S7.7 S8.6 S8.7 S9.6 S9.7 S10.6 S10.7 S11.6 S11.7 S12.6 S12.7 S13.6 S13.7 S14.6 S14.7 S15.6 S15.7 S16.6 S16.7 S17.6 S17.7 S18.6 S18.7 S19.6 S19.7 S20.6 S20.7 S21.6 S21.7 S22.6 S22.7 S23.6 S23.7 S24.6 S24.7 S25.6 S25.7 S26.6 S26.7 S27.6 S27.7 S28.6 S28.7 S29.6 S29.7 S30.6 S30.7 S31.6 S31.7 S32.6 S32.7 S33.6 S33.7 S34.6 S34.7 S35.6 S35.7 S36.6 S36.7 S37.6 S37.7 S38.6 S38.7 S39.6 S39.7 S40.6 S40.7 S41.6 S41.7 S42.6 S42.7 S43.6 S43.7 S44.6 S44.7 S45.6 S45.7 S46.6 S46.7 S47.6 S47.7 S48.6 S48.7 S49.6 S49.7 S50.6 S50.7 S51.6 S51.7 S52.6 S52.7 S53.6 S53.7 S54.6 S54.7 S55.6 S55.7 S56.6 S56.7 S57.6 S57.7 S58.6 S58.7 S59.6 S59.7 S60.6 S60.7 S61.6 S61.7 S62.6 S62.7 S63.6 S63.7 S64.6 S64.7 S65.6 S65.7 S66.6 S66.7 S67.6 S67.7 S68.6 S68.7 S69.6 S69.7 S70.6 S70.7 S71.6 S71.7 S72.6 S72.7 S73.6 S73.7 S74.6 S74.7 S75.6 S75.7 S76.6 S76.7 S77.6 S77.7 S78.6 S78.7 S79.6 S79.7 S80.6 S80.7 S81.6 S81.7 S82.6 S82.7 S83.6 S83.7 S84.6 S84.7 S85.6 S85.7 S86.6 S86.7 S87.6 S87.7 S88.6 S88.7 stm1.1 stm1.8 stm1.9 stm1.21 stm1.22 stm1.23 stm1.24 stm1.25 stm1.26 stm1.38 stm1.40
copper on no net:
  other v1: 18475,18168

## Polygon pours and split planes (outlines as drawn)
no net on Bottom Layer "NONET_L02_P025" (solid, pour order 25): 15500.75,17402.2 15500.75,12705.34 24442.25,12705.34 24442.25,17402.2
GND on Bottom Layer "GND_L02_P027" (solid, pour order 27): 15500.75,17402.2 15500.75,12705.34 8866.82,12705.34 8866.82,17402.2

## Keep-outs
Keep-Out Layer:
  circle w10: c15975,13831 r59.06
  circle w10: c22144,13831 r59.06
  circle w10: c20682,16080 r59.06
  circle w10: c9970,16831 r59.06
  circle w10: c14521,13830 r59.06
  circle w10: c10319,13831 r59.06
  circle w10: c15500,14580 r117.75
  lines w10: 8866.82,12705.34 8866.82,14462.28 ccw(c8866.89,14580.39) 8866.82,14698.5 8866.82,17402.2 24442.25,17402.2 24442.25,14698.48 ccw(c24443.1,14580.36) 24442.25,14462.25 24442.25,12705.34 8866.82,12705.34

## Silkscreen, mask and mechanical layers (free items; w line width, h text height)
Top Overlay:
  drawing of 1762 lines, arcs and shapes, not listed
Mechanical 1:
  lines w10: 8866.82,12705.34 24442.25,12705.34 24442.25,14462.25 cw(c24442.03,14580.36) 24442.25,14698.48 24442.25,17402.2 8866.82,17402.2 8866.82,14698.5 cw(c8866.89,14580.39) 8866.82,14462.28 8866.82,12705.34

## Text inside footprints (layer, text, board x,y; h text height)
stm1: Top Overlay "STM32F4x1CxU6" at 14572.05,15484.3 h70 r270